# Altium PCB PCB_ACDC底板 copy_2023-12-22.pcbdoc
Units mil, origin at the board's own origin, x right, y up, seen from the top; angles counter-clockwise.
Board outline 3755 x 2880 mil, 2 copper layers (Top Layer, Bottom Layer); 41 components, 37 nets, 147 pads, 40 vias.
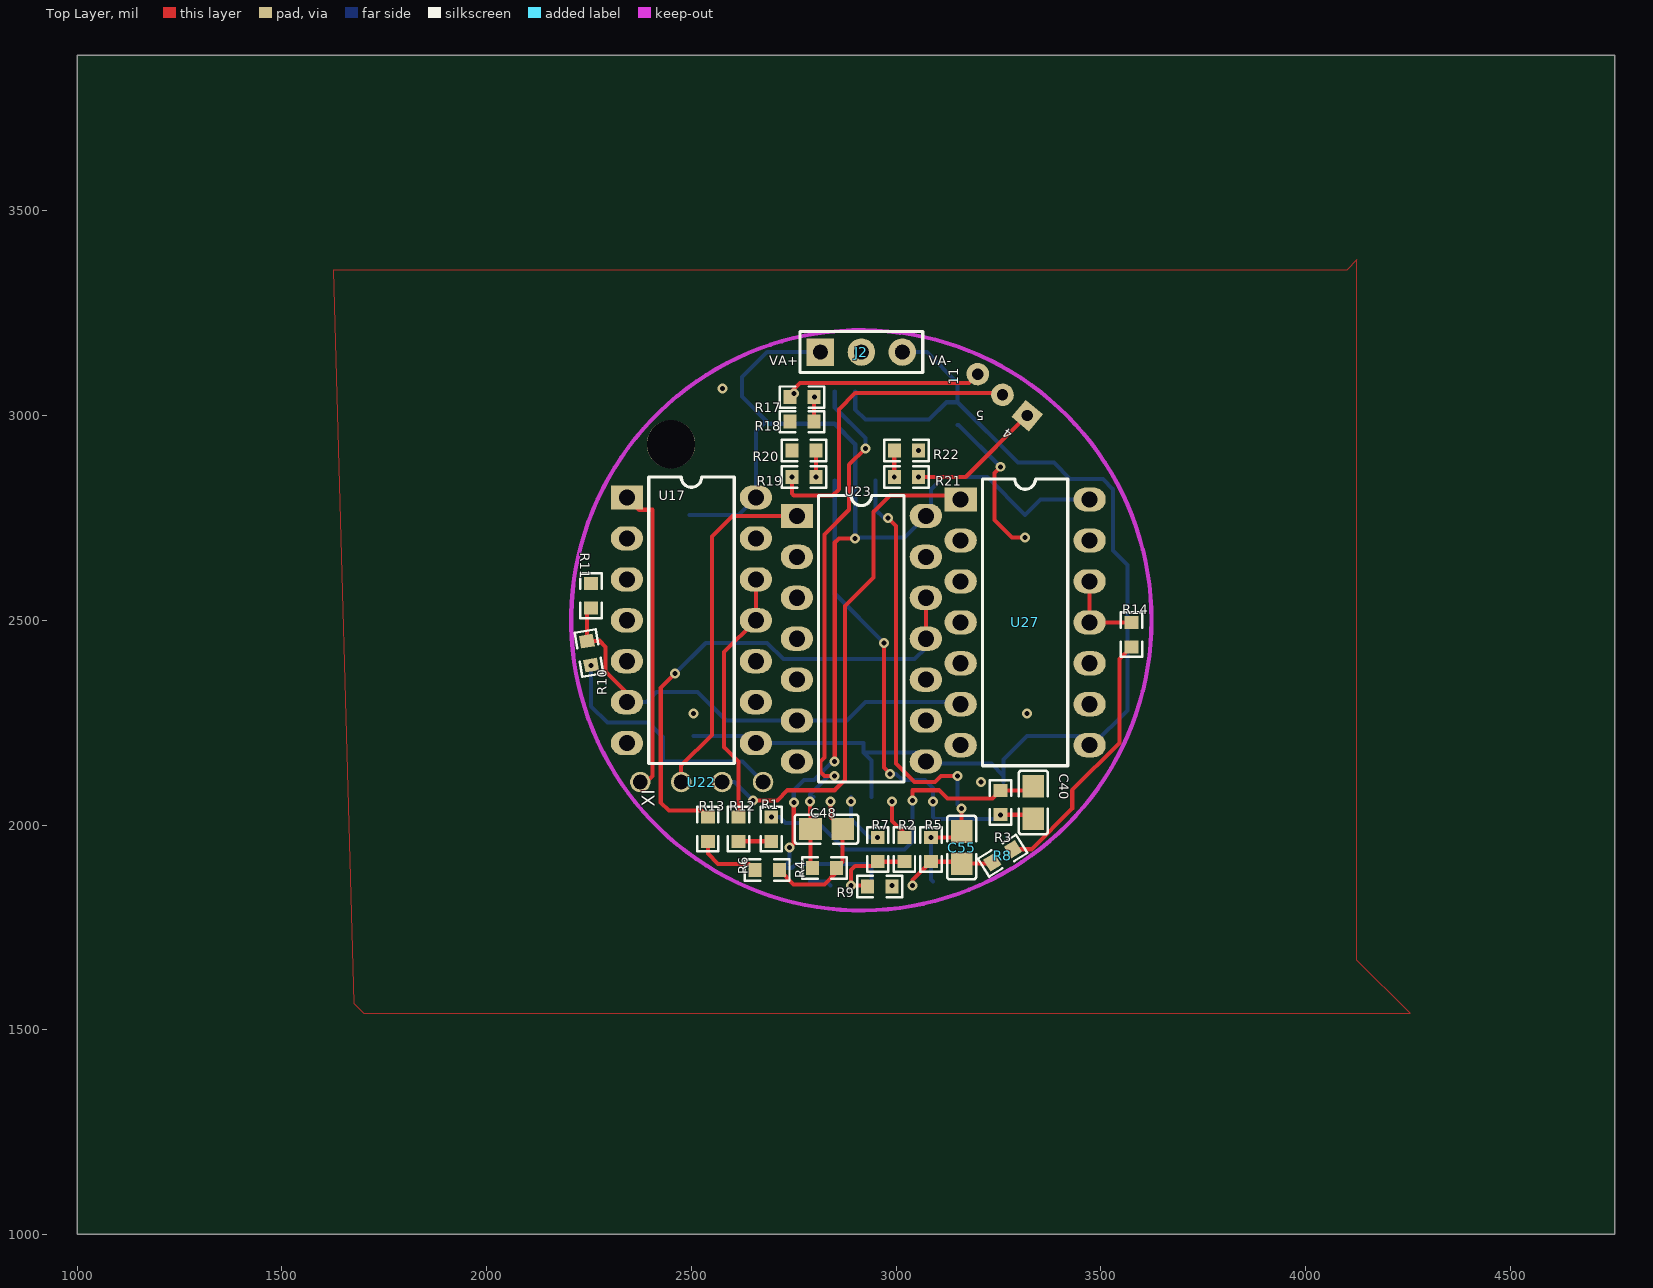
[diagram p0: Top Layer view]
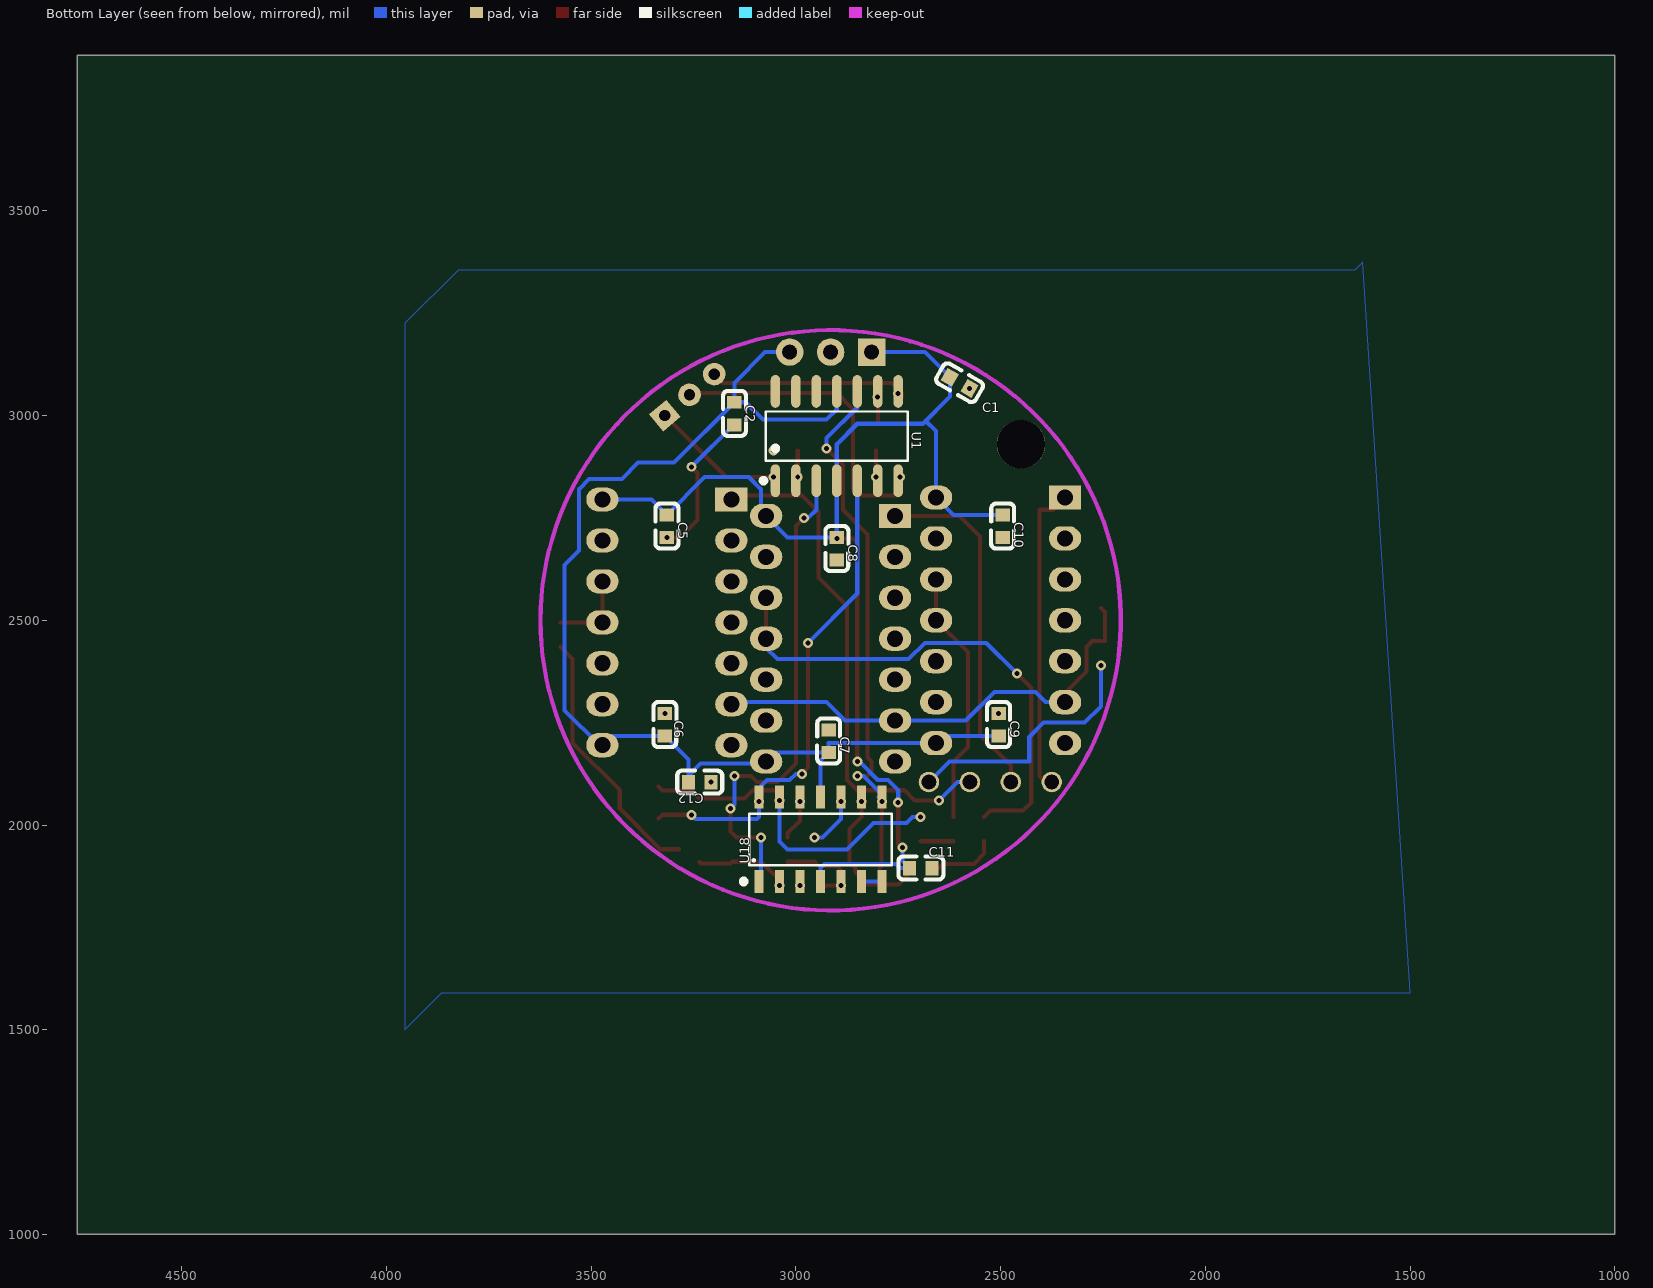
[diagram p1: Bottom Layer view, seen from below]

## Layer stack, top to bottom
Top Layer: signal copper (thickness not stored)
Dielectric: dielectric 12.6, FR-4, Dk 4.8
Bottom Layer: signal copper (thickness not stored)

## Board outline
4755,1000 1000,1000 1000,3880 4755,3880

## Components (designator, comment, footprint, x,y, rotation, side; value= is the part's Value field where it differs from the comment)
11 "排针2.0*3p" 排针2.0*3P米有 3320,3000 r50 top
C1 "0.1u" C0603 2600,3080 r30 bottom
C2 "0.1u" C0603 3150,3005 r90 bottom
C5 "0.1u" C0603 3315,2730 r90 bottom
C6 "0.1u" C0603 3320,2245 r90 bottom
C7 "0.1u" C0603 2920,2205 r90 bottom
C8 "0.1u" C0603 2900,2675 r90 bottom
C9 "0.1u" C0603 2505,2245 r90 bottom
C10 "0.1u" C0603 2495,2730 r90 bottom
C11 "0.1u" C0603 2695,1895 r180 bottom
C12 "0.1u" C0603 3235,2105 r180 bottom
C40 "15nf" C0805 3335,2055 r270 top
C48 "15nf" C0805 2830,1990 r180 top
C55 "15nf" C0805 3160,1945 r90 top
J2 "2.54 3p 两板子之间过渡用" XH2.54-3P 2915,3155 r0 top
R1 "75k" R0603 2695,1990 r90 top
R2 "62k" R0603 3020,1940 r90 top
R3 "360k" R0603 3255,2055 r270 top
R4 "360k" R0603 2825,1895 r180 top
R5 "360k" R0603 3085,1940 r90 top
R6 "75k" R0603 2685,1890 r0 top
R7 "62k" R0603 2955,1940 r90 top
R8 "75k" R0603 3260,1925 r212 top
R9 "62k" R0603 2960,1850 r0 top
R10 "1k" R0603 2250,2420 r100 top
R11 "10k" R0603 2255,2560 r270 top
R12 "4.99k" R0603 2615,1990 r270 top
R13 "4.99k" R0603 2540,1990 r270 top
R14 "4.99k" R0603 3575,2465 r270 top
R17 "3k" R0603 2770,3045 r180 top
R18 "1k" R0603 2770,2985 r0 top
R19 "3k" R0603 2775,2850 r180 top
R20 "1k" R0603 2775,2915 r0 top
R21 "3k" R0603 3025,2850 r0 top
R22 "1k" R0603 3025,2915 r180 top
U1 "OPA4182IDR" SOIC-14_L8.7-W3.9-P1.27-LS6.0-BL 2900,2950 r0 bottom
U17 "AD734ANZ" PDIP-14_L19.7-W6.6-P2.54-LS8.3-BL 2500,2500 r270 top
U18 "TL084ACDT COPY" SOP-14_L8.7-W3.9-P1.27-LS6.0-BL 2940,1965 r0 bottom
U22 "4P 2.54排针" 2.54-4P 2525,2105 r0 top
U23 "AD734ANZ" PDIP-14_L19.7-W6.6-P2.54-LS8.3-BL 2915,2455 r270 top
U27 "AD734ANZ" PDIP-14_L19.7-W6.6-P2.54-LS8.3-BL 3315,2495 r270 top

## Footprints (in the part's own frame and the unit in brackets; to place one, negate y for a bottom-side part, rotate by r counter-clockwise, add the part's x,y. Pads: shape width x height; smd on the part's side, far side on the other; paste and mask are expansions set on the pad)
2.54-4P [mil]
  round 50 hole 35 slot 35.2 at 0 deg paste+0 mask+2: 1(-150,0) 2(-50,0) 3(50,0) 4(150,0)
C0603 [mm]
  rect 0.8x0.9 smd paste+0 mask+0.051: 1(0.7,0) 2(-0.7,0)
  silkscreen extent -1.39,-0.72 1.41,0.71
C0805 [mm]
  rect 1.41x1.35 smd paste-100 mask+0.051: 1(-1,0) 2(1,0)
  silkscreen extent -1.96,-0.9 1.96,0.9
PDIP-14_L19.7-W6.6-P2.54-LS8.3-BL [mm]
  rect 1.5x2 hole 1 paste+0 mask+0.051: 1(-7.62,-4)
  oval 1.5x2 hole 1 paste+0 mask+0.051: 2(-5.08,-4) 3(-2.54,-4) 4(0,-4) 5(2.54,-4) 6(5.08,-4) 7(7.62,-4) 8(7.62,4) 9(5.08,4) 10(2.54,4) 11(0,4) 12(-2.54,4) 13(-5.08,4) 14(-7.62,4)
  silkscreen extent -8.89,-2.65 8.89,2.65
R0603 [mil]
  rect 31.75x34.02 smd paste-3937.01 mask+2: 1(-29.65,0) 2(29.65,0)
  silkscreen extent -55,-26 55,26
SOIC-14_L8.7-W3.9-P1.27-LS6.0-BL [mil]
  oval 22.6x80.24 smd paste+0 mask+2: 1(150,109.02) 2(100,109.02) 3(50,109.02) 4(0,109.02) 5(-50,109.02) 6(-100,109.02) 7(-150,109.02) 8(-150,-109.01) 9(-100,-109.01) 10(-50,-109.01) 11(0,-109.01) 12(50,-109.01) 13(100,-109.01) 14(150,-109.01)
  silkscreen extent -173,-60 185,115
SOP-14_L8.7-W3.9-P1.27-LS6.0-BL [mm]
  rect 0.56x1.43 smd paste+0 mask+0.051: 1(3.81,2.615) 2(2.54,2.615) 3(1.27,2.615) 4(0,2.615) 5(-1.27,2.615) 6(-2.54,2.615) 7(-3.81,2.615) 8(-3.81,-2.615) 9(-2.54,-2.615) 10(-1.27,-2.615) 11(0,-2.615) 12(1.27,-2.615) 13(2.54,-2.615) 14(3.81,-2.615)
  silkscreen extent -4.43,-1.6 4.86,2.71
XH2.54-3P [mm]
  rect 1.7x1.7 hole 0.9 slot 0.905 at 0 deg paste+0 mask+0.051: 1(-2.54,0)
  round 1.7 hole 0.9 slot 0.905 at 0 deg paste+0 mask+0.051: 2(0,0) 3(2.54,0)
  silkscreen extent -3.81,-1.27 3.81,1.27
排针2.0*3P米有 [mm]
  rect 1.4x1.4 hole 0.7 paste+0 mask+0.051: 1(0,0)
  round 1.4 hole 0.7 paste+0 mask+0.051: 2(0,2) 3(0,4)

## Free pads (board coordinates)
  round 118.11 hole 118.11 unplated paste+0: ""(2450,2930)

## Via types
v1: diameter 24.41, hole 12.2, Top Layer to Bottom Layer, tented both sides, 40 vias

## Nets (pads, with @x,y where several pads share a name; then routed paths per layer and width w, separated by ;. In a path a pad name is that pad's centre, name@x,y a point inside that pad or via, vN(x,y) a via of type N, cw(c..) or ccw(c..) an arc to the next point about the centre after c; other vN are vias at no path point)
1_8: R10.1 U22.4 | length 631.8
  Bottom Layer w10: v1(2255,2390) 2255,2290 2295,2250 2395,2250 2430,2215 2430,2155 2515,2155 2625,2155 U22.4
C40_1: C40.1 R1.2 R3.1 U18.13 | length 834.8
  Top Layer w10: v1(3040,2060) 3040,2085 3105,2085 3125,2065 3235.34,2065 R3.1 3325.29,2084.66 C40.1
  Bottom Layer w10: v1(2695,2020) 2715,2020 2730,2005 2810,2005 2875,1940 3020,1940 3040,1960 U18.13
C48_1: C48.1 R4.1 R6.2 U18.9 | length 358.3
  Top Layer w10: R6.2 2749.66,1855 2825,1855 2854.66,1884.66 R4.1 2869.37,1909.71 C48.1 2840,2019.37 v1(2840,2057.95)
C55_1: C55.1 R5.1 R8.2 U18.2 | length 230.2
  Top Layer w10: v1(3040,1852.05) 3040,1865.34 R5.1 3155.29,1910.34 C55.1 3231.2,1905.63 R8.2
GND: C1.2 C2.2 C5.2 C6.1 C7.1 C8.2 C9.1 C10.2 C11.1 C12.1 J2.2 R2.1 R7.1 R9.1 R11.1 R18.1 R20.1 R22.1 U17.2 U17.3 U17.4 U17.5 U17.7 U17.10 U18.5 U23.2 U23.3 U23.4 U23.5 U23.7 U23.10 U27.2 U27.3 U27.4 U27.5 U27.7 U27.10 | length 598.8
  Top Layer w10: R9.1 2928.29,1852.05 v1(2890,1852.05) 2890,1890 2900,1900 2944.66,1900 R7.1 R2.1 ; v1@3250,2875 v1(3255,2875) 3240,2860 3240,2745 3282.56,2702.44 v1(3315,2702.44)
  Bottom Layer w10: C2.2 3152.56,2977.44 v1(3255,2875)
  other v1: 3207.44,2105 2505,2272.56 3320,2272.56 3054.66,2915 2576.13,3066.22
J2_4: C55.2 R5.2 U1.3 U18.1 | length 1222.9
  Top Layer w10: v1(2980,2750) 3000,2730 3000,2150 3045,2105 3095,2105 3110,2120 v1(3150,2120) ; v1(3085,1969.66) 3145.29,1969.66 C55.2 v1(3160,2040)
  Bottom Layer w10: U1.3 2950,2770 2970,2750 v1(2980,2750) ; v1(3085,1969.66) 3085,1867.05 U18.1 ; v1(3150,2120) 3150,2050 v1(3160,2040)
J2_5: C40.2 R3.2 U1.5 U18.14 | length 1216.5
  Top Layer w10: v1(2970,2445) 2970,2140 v1(2985,2125) ; v1(3255,2025) 3325.63,2025 C40.2
  Bottom Layer w10: U1.5 2850,2565 v1(2970,2445) ; v1(2985,2125) 3000,2125 3015,2110 3070,2110 3090,2090 U18.14@3090,2067.9 ; U18.14@3090,2067.95 3090,2020 3095,2015 3245,2015 v1(3255,2025)
  other v1: 3090,2057.95
J2_11: C48.2 R4.2 U1.10 U18.8 | length 1306.2
  Top Layer w10: v1@2790,2057.9 C48.2 ; C48.2 2790.63,1899.71 R4.2 ; v1(2850,2120) 2825,2120 2815,2130 2815,2155 2825,2165 2825,2710 2885,2770 2885,2880 v1(2925,2920)
  Bottom Layer w10: U18.8@2790,2065 U18.8 ; U18.8@2797.95,2067.95 U18.8 ; v1(2850,2120) 2835,2120 2790,2075 U18.8 ; U1.10 2850,3020 2925,2945 v1(2925,2920)
  other v1: 2790,2057.95
R1_1: R1.1 R12.2 | length 80
  Top Layer w10: R12.2 R1.1
R6_1: R6.1 R13.2 | length 162.2
  Top Layer w10: R13.2 2540,1930 2565,1905 2640.34,1905 R6.1
R8_1: R8.1 R14.2 | length 641.4
  Top Layer w10: R8.1@3285.15,1940.72 3330.72,1940.72 3430,2040 3430,2085 3545,2200 3545,2405.34 R14.2
S$5650: 
U1_2: R21.1 R22.2 U1.2 | length 65
  Top Layer w10: v1(2995.34,2850) R22.2
U1_6: R19.1 R20.2 U1.6 | length 76
  Top Layer w10: v1(2804.66,2850) R20.2
  Bottom Layer w10: U1.6 2800,2845.34 v1(2804.66,2850)
U1_9: R17.1 R18.2 U1.9 | length 60
  Top Layer w10: R18.2 R17.1
  other v1: 2800,3045
U17_6: R10.2 R11.2 U17.6 U23.6 U27.6 | length 1171.4
  Top Layer w10: R10.2 2244.85,2520.19 R11.2 ; R10.2@2244.9,2449.2 2275,2450 2290,2435 2290,2375 2342.5,2322.5 U17.6
  Bottom Layer w10: U17.6 2390,2300 2415,2325 2515,2325 2585,2255 U23.6 2880,2255 2925,2300 3157.5,2300 U27.6
U17_9: U17.9
U17_11: R12.1 U17.11 U17.12 | length 626.9
  Top Layer w10: R12.1 2615,2155 2580,2190 2580,2422.5 U17.11 U17.12
U17_13: U17.13
U18_3: R9.2 U18.3
  other v1: 2990,1852.05
U18_6: U18.6 U18.7 | length 54.1
  Bottom Layer w10: U18.7 2830,1862.05 U18.6@2840,1852.05
U18_10: R7.2 U18.10 | length 136.7
  Bottom Layer w10: U18.10 2890,2015 2935.34,1969.66 v1(2955,1969.66)
  other v1: 2890,2057.95
U18_12: R2.2 U18.12 | length 100.7
  Top Layer w10: v1(2990,2057.95) 2990,2010 3020,1980 R2.2
U23_9: U23.9
U23_11: R13.1 U23.11 U23.12 | length 1422.8
  Top Layer w10: 2425,2100 2425,2055 ; v1(2460,2370) 2425,2335 2425,2055 ; U23.11 U23.12@3072.48,2550 ; 2425,2055 2445,2035 ; 2425,2055 2445,2035 ; 2445,2035 R13.1@2524.66,2035 ; 2445,2035 R13.1@2524.66,2035 ; R13.1@2524.66,2035 R13.1 R13.1@2524.66,2035
  Bottom Layer w10: v1(2460,2370) 2535,2445 2685,2445 2725,2405 3045,2405 3072.5,2432.5 U23.11
U23_13: U23.13
U27_9: U27.9
U27_11: R14.1 U27.11 U27.12 | length 202.5
  Top Layer w10: U27.12 U27.11 R14.1
U27_13: U27.13
VA+: C1.1 C5.1 C8.1 C10.1 C11.2 J2.1 U1.4 U17.14 U18.4 U23.14 U27.14 | length 3097.2
  Top Layer w10: v1(2740,1945) 2750,1955 v1(2750,2055) ; v1(2850,2155) 2850,2690 2860,2700 v1(2900,2700)
  Bottom Layer w10: C10.1 2615.04,2757.56 U17.14 2657.48,2962 2682.74,2987.26 ; v1(2740,1945) 2740,1912.44 C11.2 2745,1895 2755,1905 2930,1905 2940,1895 U18.4 ; v1(2750,2055) 2750,2085 2775,2110 2800,2110 2845,2155 v1(2850,2155) ; J2.1 2685.09,3155 C1.1 2623.87,3046.13 2690,2980 2850,2980 2900,2930 U1.4 C8.1 3020.04,2702.56 U23.14 3085,2755 3085,2820 3115,2850 3222.56,2850 C5.1 3352.44,2795 U27.14
VA-: C2.1 C6.2 C7.2 C9.2 C12.2 J2.3 U1.11 U17.8 U18.11 U23.8 U27.8 | length 2930.7
  Bottom Layer w10: C9.2 2640.04,2217.44 U17.8 2920,2200 C7.2 ; U1.11 2900,3015 2925,2990 3080,2990 3122.56,3032.56 C2.1 ; U18.11 2940,2157.44 C7.2 3050.04,2177.44 U23.8 3072.5,2150 3232.6,2150 3262.6,2120 C12.2 ; J2.3 3075,3155 3150,3080 C2.1 ; C12.2 3262.56,2160 C6.2 3450.04,2217.44 U27.8 3480,2195 3565,2280 3565,2635 3530,2670 3530,2820 3505,2845 3425,2845 3385,2885 3297.56,2885 C2.1
X: U17.1 U22.1 | length 761.1
  Top Layer w10: U17.1 2372.5,2770 2405,2770 2405,2120 2390,2105 U22.1
XOUT: 11.1 R21.2 U1.1 | length 327.5
  Top Layer w10: v1(3054.66,2850) 3170,2850 11.1
Y: U22.2 U23.1 | length 859.3
  Top Layer w10: U22.2 2475,2145 2550,2220 2550,2705 2600,2755 U23.1
YOUT: 11.2 R19.2 U1.7 | length 776.3
  Top Layer w10: v1(2745.34,2850) 2745.3,2809.7 2750,2805 2845,2805 2860,2820 2860,3015 2900,3055 3255.3,3055 11.2
Z: U22.3 U27.1 | length 1262.4
  Top Layer w10: v1(2650,2060) 2710,2060 2735,2085 2850,2085 2875,2110 2875,2535 2945,2605 2945,2765 2985,2805 3157.5,2805 U27.1
  Bottom Layer w10: U22.3 2605,2105 v1(2650,2060)
ZOUT: 11.3 R17.2 U1.8 | length 501.6
  Top Layer w10: R17.2 v1(2750,3054.02) ; R17.2 2740.34,3055.34 2765,3080 3178.14,3080 11.3
pads on no net: U1.12 U1.13 U1.14

## Polygon pours and split planes (outlines as drawn)
GND on Bottom Layer (solid): 1615,3375 1635,3355 3825,3355 3955,3225 3955,1500 3865,1590 1500,1590
GND on Top Layer (solid): 1675,1565 1700,1540 4255,1540 4125,1670 4125,3380 4100,3355 1625,3355

## Keep-outs
Keep-Out Layer:
  circle w10 net S$5650: c2915,2500 r708.66

## Silkscreen, mask and mechanical layers (free items; w line width, h text height)
Top Overlay:
  text "VA+" at 2690,3123.19 h23.62
  text "VA-" at 3080,3123.19 h23.62
  text "5" at 3215,3011.81 h23.62 r180
  text "4" at 3286.94,2959.56 h23.62 r144
  text "XI" at 2410.75,2045 h31.5 r90